# Altium PCB PCB_KEYBOARD.PcbDoc
Units mm, origin at the board's own origin, x right, y up, seen from the top; angles counter-clockwise.
Board outline 150.15 x 100.19 mm, 2 copper layers (Top Layer, Bottom Layer); 37 components, 31 nets, 203 pads, 20 vias.
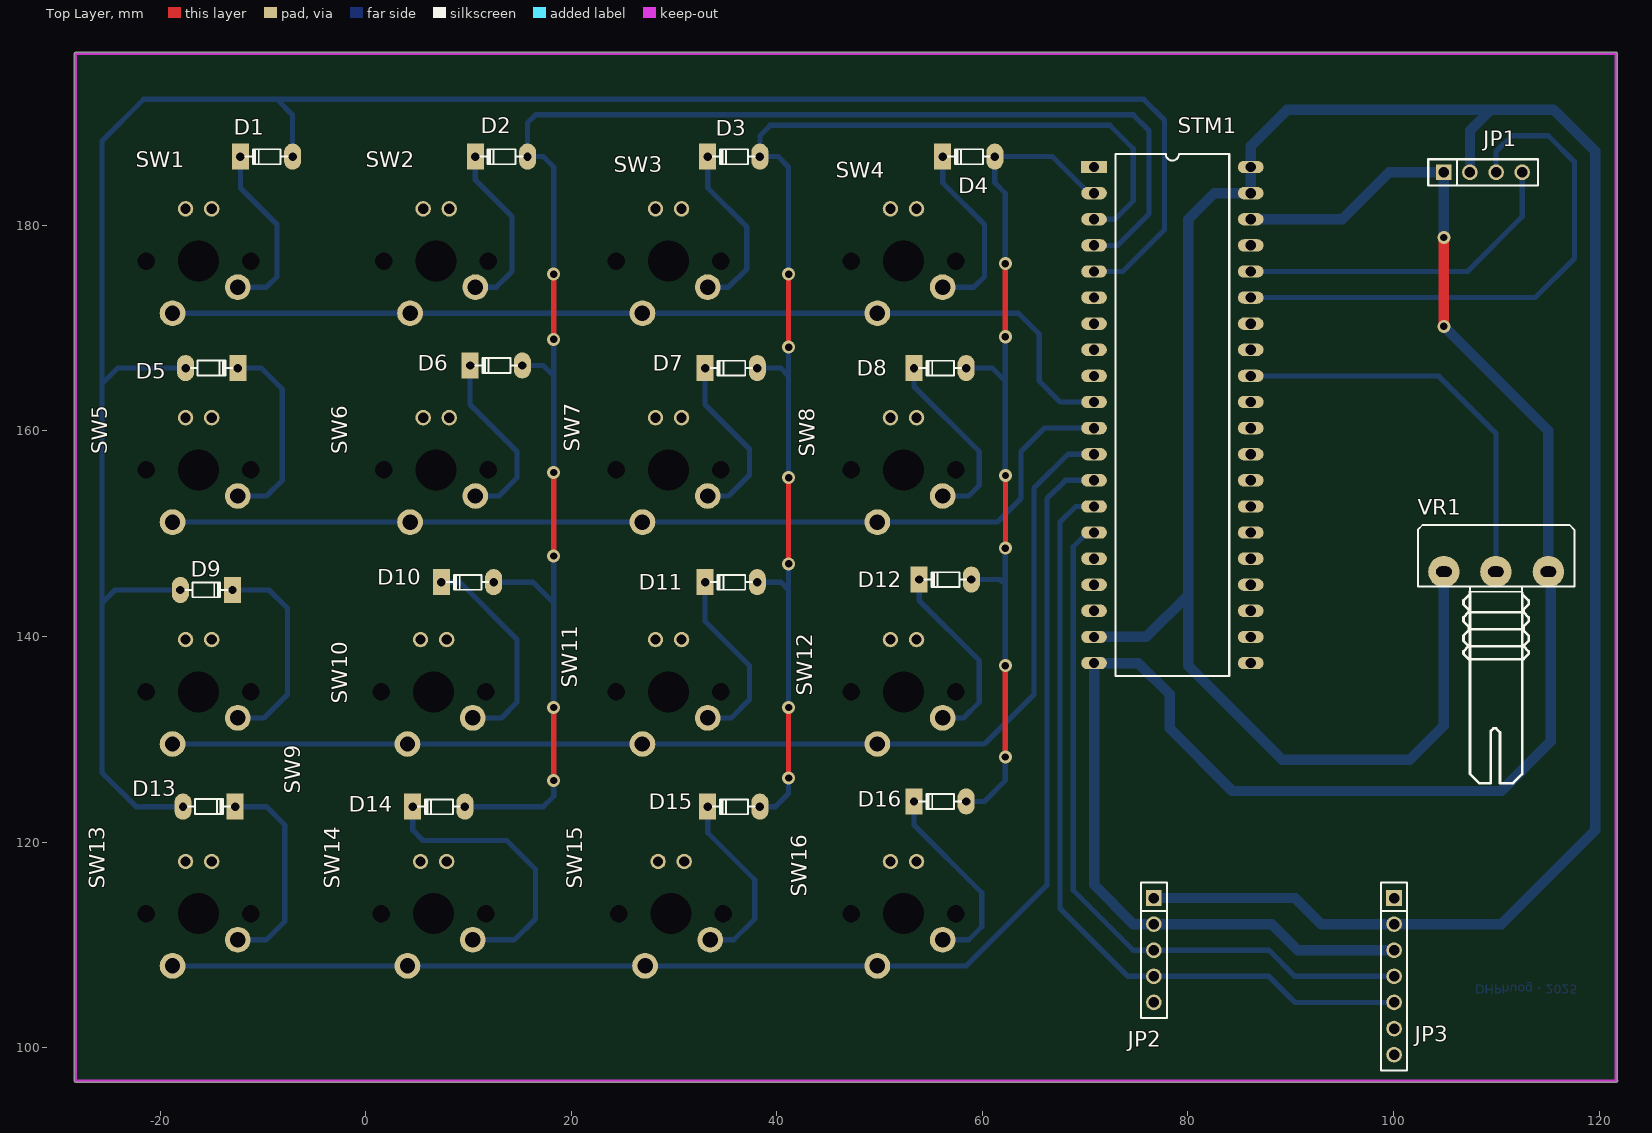
[diagram p0: Top Layer view]
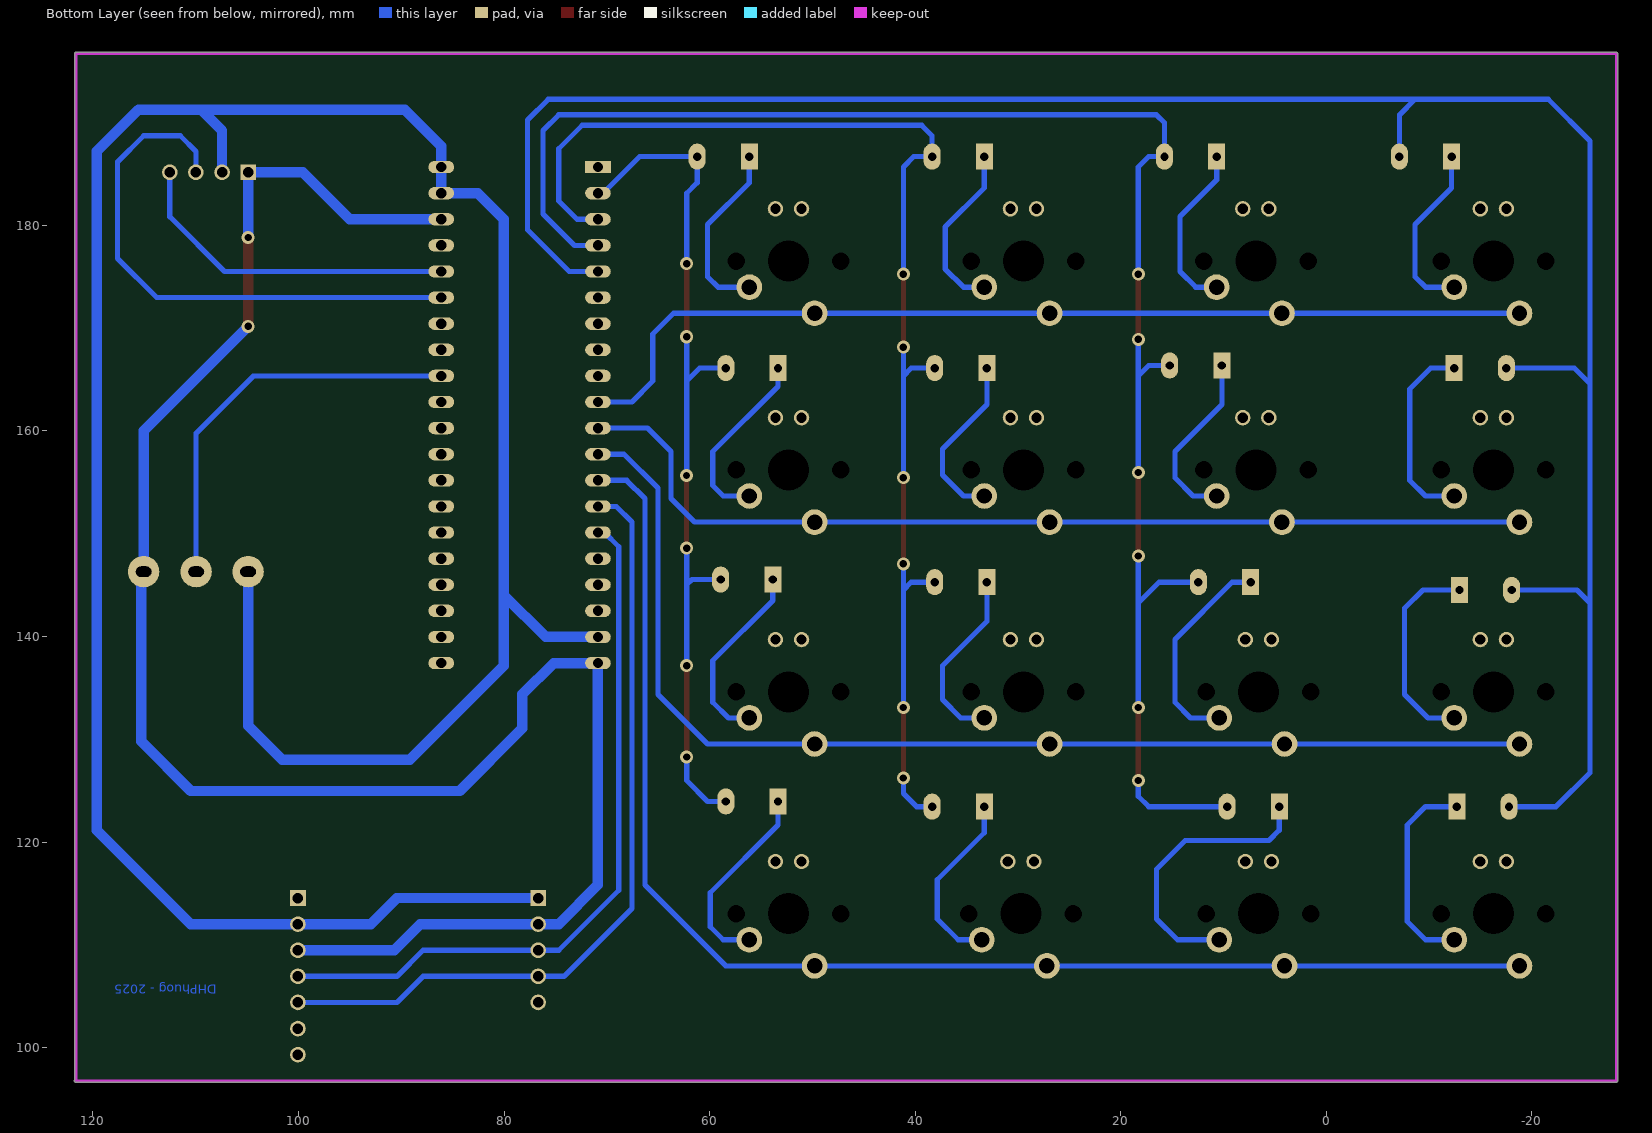
[diagram p1: Bottom Layer view, seen from below]
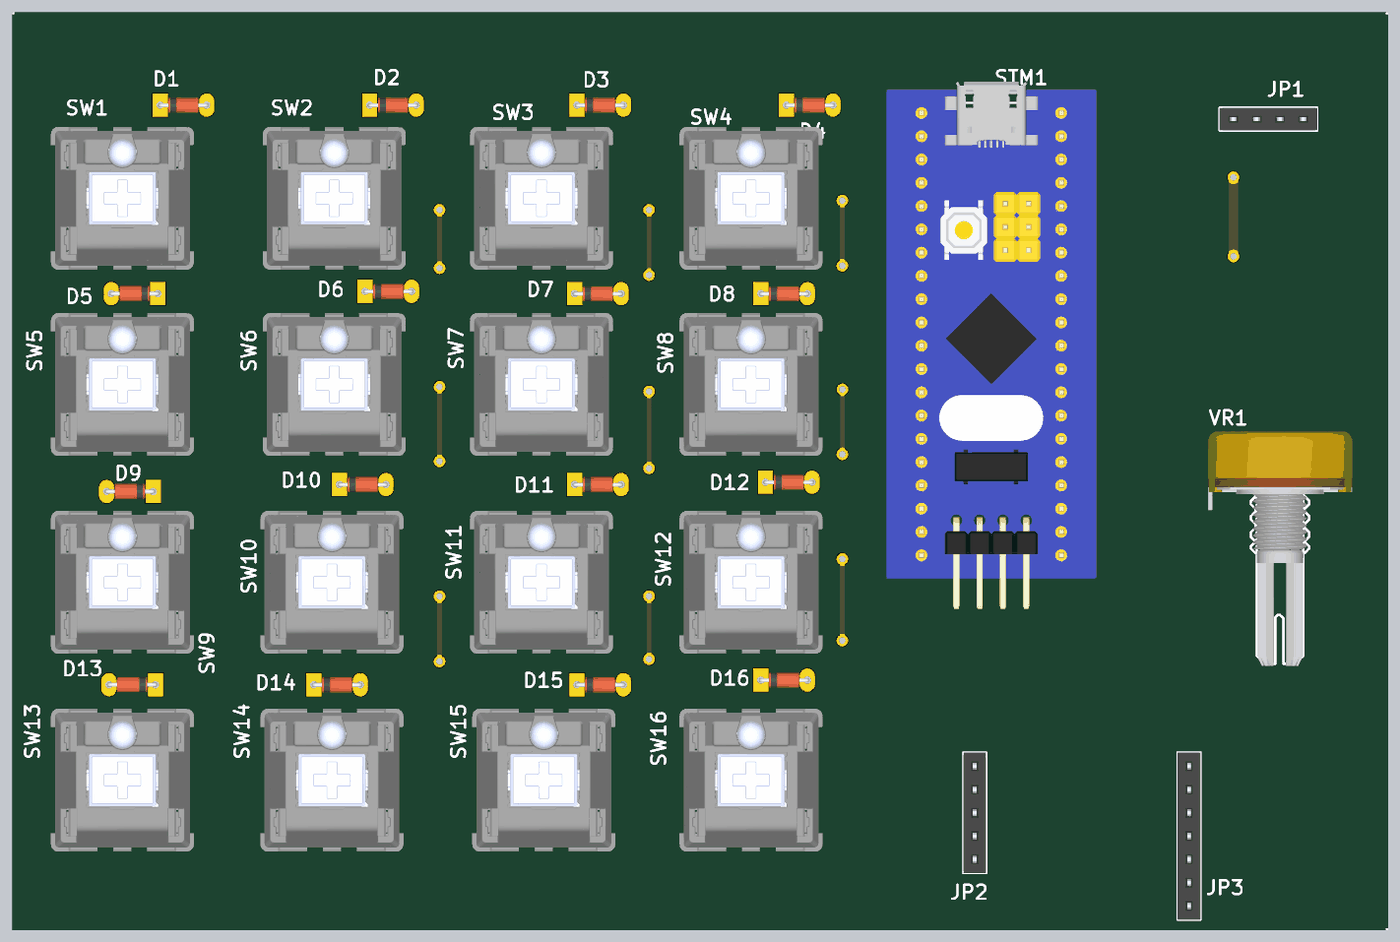
[diagram p2: 3D render of the assembled board from above, using the file's embedded part models]

## Layer stack, top to bottom
Top Solder: solder mask 0.0102, Solder Resist, Dk 3.5
Top Layer: signal copper 0.0356
Dielectric 1: dielectric 0.32, FR-4, Dk 4.8
Bottom Layer: signal copper 0.0356
Bottom Solder: solder mask 0.0102, Solder Resist, Dk 3.5

## Board outline
-28.219,96.647 cw(c-28.219,96.774) -28.346,96.774 -28.346,196.706 cw(c-28.219,196.706) -28.219,196.833 121.641,196.833 cw(c121.641,196.706) 121.768,196.706 121.768,187.706 121.768,96.866 cw(c121.68,96.774) 121.807,96.774 cw(c121.68,96.774) 121.68,96.647

## Design rules (kind name [scope] priority, off if disabled: settings)
Clearance [All] p1: gap=0.254 ignorepadtopadclearanceinfootprint=FALSE except(0: Arc-Hole Track-Hole SMDPad-Hole THPad-Hole Via-Hole Fill-Hole Poly-Hole Region-Hole Text-Hole)
PolygonConnect [All] p1: connectstyle=Relief reliefconductorwidth=0.254 reliefentries=4 polygonreliefangle="45 Angle" airgapwidth=0.508
RoutingVias [All] p1: holewidth=0.381 width=0.762 viastyle="Through Hole" minholewidth=0.254 minwidth=0.508 maxholewidth=0.711 maxwidth=1.27
SolderMaskExpansion [All] p1: expansion=0.102 istentingtop=FALSE
Width [All] p1: maxlimit=1.016 minlimit=0.254 preferedwidth=0.508
30 further rules are at their usual default settings.

## Classes and differential pairs
component class schematic: D2 D3 D5 D6 D7 D10 D11 D12 D13 D14 D16 JP1 JP2 JP3 STM1 SW1 SW2 SW3 SW4 SW5 SW6 SW7 SW8 SW9 SW11 SW12 SW13 SW14 SW15 SW16 VR1

## Components (designator, comment, footprint, x,y, rotation, side; value= is the part's Value field where it differs from the comment)
D1 "100v" "DIODE 0.5A" -9.652,186.69 r0 top
D2 "100v" "DIODE 0.5A" 13.208,186.69 r0 top
D3 "100v" "DIODE 0.5A" 35.814,186.69 r0 top
D4 "100v" "DIODE 0.5A" 58.674,186.69 r0 top
D5 "100v" "DIODE 0.5A" -14.986,166.116 r180 top
D6 "100v" "DIODE 0.5A" 12.7,166.37 r0 top
D7 "100v" "DIODE 0.5A" 35.56,166.116 r0 top
D8 "100v" "DIODE 0.5A" 55.88,166.116 r0 top
D9 "100v" "DIODE 0.5A" -15.494,144.526 r180 top
D10 "100v" "DIODE 0.5A" 9.906,145.288 r0 top
D11 "100v" "DIODE 0.5A" 35.56,145.288 r0 top
D12 "100v" "DIODE 0.5A" 56.388,145.542 r0 top
D13 "100v" "DIODE 0.5A" -15.24,123.444 r180 top
D14 "100v" "DIODE 0.5A" 7.112,123.444 r0 top
D15 "100v" "DIODE 0.5A" 35.814,123.444 r0 top
D16 "100v" "DIODE 0.5A" 55.88,123.952 r0 top
JP1 "JP 1x4 2.54" "JP 1x4 CT" 104.902,185.166 r0 top
JP2 "JP 1x5 2.54" "JP 1x5 CT" 76.683,114.554 r270 top
JP3 "JP 1x7 2.54" "JP 1x7 CT" 100.051,114.554 r270 top
STM1 "KIT STM32F103C8T6" "STM32F103 KIT" 70.866,185.674 r0 top
SW1 "Cherry MX with an LED" MX_Cherry_LED -16.256,176.53 r180 top
SW2 "Cherry MX with an LED" MX_Cherry_LED 6.858,176.53 r180 top
SW3 "Cherry MX with an LED" MX_Cherry_LED 29.464,176.53 r180 top
SW4 "Cherry MX with an LED" MX_Cherry_LED 52.324,176.53 r180 top
SW5 "Cherry MX with an LED" MX_Cherry_LED -16.256,156.21 r180 top
SW6 "Cherry MX with an LED" MX_Cherry_LED 6.858,156.21 r180 top
SW7 "Cherry MX with an LED" MX_Cherry_LED 29.464,156.21 r180 top
SW8 "Cherry MX with an LED" MX_Cherry_LED 52.324,156.21 r180 top
SW9 "Cherry MX with an LED" MX_Cherry_LED -16.256,134.62 r180 top
SW10 "Cherry MX with an LED" MX_Cherry_LED 6.604,134.62 r180 top
SW11 "Cherry MX with an LED" MX_Cherry_LED 29.464,134.62 r180 top
SW12 "Cherry MX with an LED" MX_Cherry_LED 52.324,134.62 r180 top
SW13 "Cherry MX with an LED" MX_Cherry_LED -16.256,113.03 r180 top
SW14 "Cherry MX with an LED" MX_Cherry_LED 6.604,113.03 r180 top
SW15 "Cherry MX with an LED" MX_Cherry_LED 29.718,113.03 r180 top
SW16 "Cherry MX with an LED" MX_Cherry_LED 52.324,113.03 r180 top
VR1 "10K" "Bien Tro Volume Don" 104.902,146.304 r0 top

## Footprints (in the part's own frame and the unit in brackets; to place one, negate y for a bottom-side part, rotate by r counter-clockwise, add the part's x,y. Pads: shape width x height; smd on the part's side, far side on the other; paste and mask are expansions set on the pad)
"Bien Tro Volume Don" [mil] "Volume control single"
  round 120 hole 40 slot 60 at 0 deg: 1(0,0) 2(199,0) 3(400,0)
  silkscreen extent -99,-810 500,179, body extent -110,-818 510,188, height 839
"DIODE 0.5A" [mil] "Diode muoi, xung"
  oval 65x100 hole 32: 1(100,0)
  rect 65x100 hole 32: 2(-100,0)
  silkscreen extent -80,-30 80,28, body extent -108,-33 108,32, height 61
"JP 1x4 CT" [mm]
  rect 1.52x1.52 hole 1.02: 1(0,0)
  round 1.52 hole 1.02: 2(2.54,0) 3(5.08,0) 4(7.62,0)
  silkscreen extent -1.52,-1.27 9.14,1.27, body extent -1.52,-1.25 9.14,1.25, height 8.51
"JP 1x5 CT" [mm]
  rect 1.52x1.52 hole 1.02: 1(0,0)
  round 1.52 hole 1.02: 2(2.54,0) 3(5.08,0) 4(7.62,0) 5(10.16,0)
  silkscreen extent -1.52,-1.27 11.68,1.27, body extent -1.52,-1.25 11.68,1.25, height 8.51
"JP 1x7 CT" [mm] "7 row, straight, gold plating"
  rect 1.52x1.52 hole 1.02: 1(0,0)
  round 1.52 hole 1.02: 2(2.54,0) 3(5.08,0) 4(7.62,0) 5(10.16,0) 6(12.7,0) 7(15.24,0)
  silkscreen extent -1.52,-1.27 16.76,1.27, body extent -1.52,-1.25 16.76,1.25, height 8.51
MX_Cherry_LED [mm] "Cherry Key Pad with LED"
  round 2.5 hole 1.5: 1(2.54,5.08) 2(-3.81,2.54)
  round 1.5 hole 1: 3(-1.27,-5.08) 4(1.27,-5.08)
  round 0 hole 1.702: 6(-5.08,0) 6(5.08,0)
  round 0 hole 3.988: Hole(0,0)
  body extent -7.75,-7.8 7.85,7.8, height 14.9
"STM32F103 KIT" [mm]
  rect 2.5x1.2 hole 1: 1(0,0)
  oval 2.5x1.2 hole 1: 2(0,-2.54) 3(0,-5.08) 4(0,-7.62) 5(0,-10.16) 6(0,-12.7) 7(0,-15.24) 8(0,-17.78) 9(0,-20.32) 10(0,-22.86) 11(0,-25.4) 12(0,-27.94) 13(0,-30.48) 14(0,-33.02) 15(0,-35.56) 16(0,-38.1) 17(0,-40.64) 18(0,-43.18) 19(0,-45.72) 20(0,-48.26) 21(15.24,-48.26) 22(15.24,-45.72) 23(15.24,-43.18) 24(15.24,-40.64) 25(15.24,-38.1) 26(15.24,-35.56) 27(15.24,-33.02) 28(15.24,-30.48) 29(15.24,-27.94) 30(15.24,-25.4) 31(15.24,-22.86) 32(15.24,-20.32) 33(15.24,-17.78) 34(15.24,-15.24) 35(15.24,-12.7) 36(15.24,-10.16) 37(15.24,-7.62) 38(15.24,-5.08) 39(15.24,-2.54) 40(15.24,0)
  silkscreen extent 2.08,-49.53 13.16,1.27, body extent -3.81,-53.97 19.05,3.59, height 16.12

## Part data
D1 D2 D3 D4 D5 D6 D7 D8 D9 D10 D11 D12 D13 D14 D15 D16: library part "Diode 1N4148", "Cắm", Chung_Loai=Cắm, Don_Vi=Con, Ma_Hang=MH001065, Ten_Linh_Kien="Diode 1N4148 DO35 450mA 100V ( 1N4148 DIP)"
JP1: library part "JP 1x4 2.54 Cai Thang", "Cắm", Chung_Loai=Cắm, Don_Vi=Con, Ma_Hang=MH004006, Ten_Linh_Kien="Jump Đơn Cái 2.54MM 1x20P Thẳng"
JP2: library part "JP 1x5 2.54 Cai Thang", "Cắm", Chung_Loai=Cắm, Don_Vi=Con, Ma_Hang=MH004006, Ten_Linh_Kien="Jump Đơn Cái 2.54MM 1x20P Thẳng"
JP3: library part "JP 1x7 2.54 Cai Thang", "Cắm", Chung_Loai=Cắm, Don_Vi=Con, Ma_Hang=MH004006, Ten_Linh_Kien="Jump Đơn Cái 2.54MM 1x20P Thẳng"
STM1: library part "STM32f103 Bluepill", "KIT STM32F103C8T6 Bluepill"
SW1 SW2 SW3 SW4 SW5 SW6 SW7 SW8 SW9 SW10 SW11 SW12 SW13 SW14 SW15 SW16: library part MX_Cherry_LED
VR1: library part "Triet Ap Don 10k", "Cắm", Chung_Loai=Cắm, Don_Vi=Con, Ma_Hang=MH001417, Ten_Linh_Kien="Triết Áp Đơn B10K"

## Via types
v1: diameter 1.27, hole 0.711, Top Layer to Bottom Layer, 20 vias

## Nets (pads, with @x,y where several pads share a name; then routed paths per layer and width w, separated by ;. In a path a pad name is that pad's centre, name@x,y a point inside that pad or via, vN(x,y) a via of type N, cw(c..) or ccw(c..) an arc to the next point about the centre after c; other vN are vias at no path point)
+3.3: JP1.1 JP2.2 JP3.3 STM1.20 STM1.38 VR1.3 | length 187.3
  Top Layer w1.016: v1(104.902,170.18) v1(104.902,178.816)
  Bottom Layer w1.016: STM1.38 94.996,180.594 99.568,185.166 JP1.1 v1(104.902,178.816) ; JP3.3 90.678,109.474 88.138,112.014 JP2.2 74.676,112.014 70.866,115.824 STM1.20 75.184,137.414 78.232,134.366 78.232,131.064 84.328,124.968 110.49,124.968 115.316,129.794 115.316,146.05 VR1.3 115.062,160.02 v1(104.902,170.18)
COL1: D1.1 D5.1 D9.1 D13.1 STM1.5 | length 218.9
  Bottom Layer w0.508: D9.1 -24.384,144.526 -25.654,143.256 ; D13.1 -22.352,123.444 -25.654,126.746 -25.654,143.256 ; D5.1 -24.13,166.116 -25.654,164.592 ; D1.1 -7.112,190.754 -8.636,192.278 ; STM1.5 73.66,175.514 77.724,179.578 77.724,190.246 75.692,192.278 -8.636,192.278 ; -25.654,143.256 -25.654,164.592 ; -25.654,164.592 -25.654,188.214 -21.59,192.278 -8.636,192.278
COL2: D2.1 D6.1 D10.1 D14.1 STM1.4 | length 162.8
  Top Layer w0.508: v1(18.288,125.984) v1(18.288,133.096) ; v1(18.288,147.828) v1(18.288,155.956) ; v1(18.288,168.91) v1(18.288,175.26)
  Bottom Layer w0.508: D14.1 17.272,123.444 18.288,124.46 v1(18.288,125.984) ; D10.1 16.256,145.288 18.288,143.256 ; D6.1 17.272,166.37 18.288,165.354 ; v1(18.288,133.096) 18.288,143.256 ; v1(18.288,147.828) 18.288,143.256 ; v1(18.288,155.956) 18.288,165.354 ; v1(18.288,168.91) 18.288,165.354 ; v1(18.288,175.26) 18.288,185.674 17.272,186.69 D2.1 15.748,189.992 16.51,190.754 74.676,190.754 76.2,189.23 76.2,181.102 73.152,178.054 STM1.4
COL3: D3.1 D7.1 D11.1 D15.1 STM1.3 | length 123.6
  Top Layer w0.508: v1(41.148,126.238) v1(41.148,133.096) ; v1(41.148,147.066) v1(41.148,155.448) ; v1(41.148,168.148) v1(41.148,175.26)
  Bottom Layer w0.508: D11.1 40.386,145.288 41.148,144.526 ; D7.1 40.386,166.116 41.148,165.354 ; D15.1 39.878,123.444 41.148,124.714 v1(41.148,126.238) ; v1(41.148,133.096) 41.148,144.526 ; v1(41.148,147.066) 41.148,144.526 ; v1(41.148,155.448) 41.148,165.354 ; v1(41.148,168.148) 41.148,165.354 ; v1(41.148,175.26) 41.148,185.674 40.132,186.69 D3.1 38.354,188.722 39.37,189.738 72.39,189.738 74.676,187.452 74.676,182.372 72.898,180.594 STM1.3
COL4: D4.1 D8.1 D12.1 D16.1 STM1.2 | length 84.3
  Top Layer w0.508: v1(62.23,128.27) v1(62.23,137.16) ; v1(62.23,148.59) 62.243,148.603 v1(62.243,155.668) ; v1(62.23,169.164) v1(62.23,176.276)
  Bottom Layer w0.508: D16.1 60.198,123.952 62.23,125.984 v1(62.23,128.27) ; D8.1 60.96,166.116 62.23,164.846 ; D12.1 61.722,145.542 62.23,145.034 ; v1(62.23,137.16) 62.23,145.034 ; v1(62.23,148.59) 62.23,145.034 ; v1(62.23,169.164) 62.23,164.846 ; v1(62.23,176.276) 62.23,183.134 61.214,184.15 D4.1 66.802,186.69 STM1.2@70.358,183.134 ; v1(62.243,155.668) 62.23,155.681 62.23,164.846
DS1307_SCL: JP2.4 JP3.5 STM1.14 | length 77.8
  Bottom Layer w0.508: STM1.14 69.088,152.654 67.564,151.13 67.564,113.538 74.168,106.934 JP2.4 87.884,106.934 90.424,104.394 JP3.5
DS1307_SDA: JP2.3 JP3.4 STM1.15 | length 70.7
  Bottom Layer w0.508: STM1.15 70.216,150.114 68.834,148.732 68.834,115.316 74.676,109.474 JP2.3 87.884,109.474 90.424,106.934 JP3.4
GND: JP1.2 JP2.1 JP3.2 STM1.19 STM1.39 STM1.40 VR1.1 | length 269.1
  Bottom Layer w1.016: STM1.19@70.216,139.954 STM1.19 75.946,139.954 80.01,144.018 ; JP2.1 90.424,114.554 92.964,112.014 JP3.2 110.49,112.014 119.634,121.158 119.634,187.198 115.57,191.262 109.474,191.262 ; VR1.1 104.902,131.318 101.6,128.016 89.154,128.016 80.01,137.16 80.01,144.018 ; JP1.2 107.442,189.23 109.474,191.262 ; 80.01,144.018 80.01,180.594 82.55,183.134 STM1.39 STM1.40 86.106,187.706 89.662,191.262 109.474,191.262
NetD1_2: D1.2 SW1.2 | length 17.4
  Bottom Layer w0.508: SW1.2 -9.652,173.99 -8.636,175.006 -8.636,180.086 -12.192,183.642 D1.2
NetD2_2: D2.2 SW2.2 | length 16.8
  Bottom Layer w0.508: SW2.2 12.7,173.99 14.224,175.514 14.224,180.848 10.668,184.404 D2.2
NetD3_2: D3.2 SW3.2 | length 17
  Bottom Layer w0.508: SW3.2 35.306,173.99 37.084,175.768 37.084,179.832 33.274,183.642 D3.2
NetD4_2: D4.2 SW4.2 | length 17.9
  Bottom Layer w0.508: SW4.2 59.182,173.99 60.198,175.006 60.198,180.086 56.134,184.15 D4.2
NetD5_2: D5.2 SW5.2 | length 19
  Bottom Layer w0.508: SW5.2 -9.652,153.67 -8.128,155.194 -8.128,164.084 -10.16,166.116 D5.2
NetD6_2: D6.2 SW6.2 | length 17.6
  Bottom Layer w0.508: D6.2 10.16,162.56 14.732,157.988 14.732,155.448 12.954,153.67 SW6.2
NetD7_2: D7.2 SW7.2 | length 17.1
  Bottom Layer w0.508: D7.2 33.02,162.56 37.338,158.242 37.338,155.702 35.306,153.67 SW7.2
NetD8_2: D8.2 SW8.2 | length 18
  Bottom Layer w0.508: D8.2 53.34,164.338 59.69,157.988 59.69,154.686 58.674,153.67 SW8.2
NetD9_2: D9.2 SW9.2 | length 20.2
  Bottom Layer w0.508: D9.2 -9.398,144.526 -7.62,142.748 -7.62,134.366 -9.906,132.08 SW9.2
NetD10_2: D10.2 SW10.2 | length 20.7
  Bottom Layer w0.508: D10.2 9.144,145.288 14.732,139.7 14.732,133.604 13.208,132.08 SW10.2
NetD11_2: D11.2 SW11.2 | length 18
  Bottom Layer w0.508: D11.2 33.02,141.478 37.338,137.16 37.338,133.858 35.56,132.08 SW11.2
NetD12_2: D12.2 SW12.2 | length 18.5
  Bottom Layer w0.508: D12.2 53.848,143.51 59.69,137.668 59.69,133.604 58.166,132.08 SW12.2
NetD13_2: D13.2 SW13.2 | length 20.3
  Bottom Layer w0.508: D13.2 -9.652,123.444 -7.874,121.666 -7.874,112.268 -9.652,110.49 SW13.2
NetD14_2: D14.2 SW14.2 | length 27.6
  Bottom Layer w0.508: D14.2 4.572,121.158 5.588,120.142 13.716,120.142 16.51,117.348 16.51,112.522 14.478,110.49 SW14.2
NetD15_2: D15.2 SW15.2 | length 18
  Bottom Layer w0.508: D15.2 33.274,120.904 37.846,116.332 37.846,112.522 35.814,110.49 SW15.2
NetD16_2: D16.2 SW16.2 | length 19.3
  Bottom Layer w0.508: D16.2 53.34,121.666 59.944,115.062 59.944,111.76 58.674,110.49 SW16.2
OLED_SCL: JP1.3 STM1.35 | length 54.1
  Bottom Layer w0.508: STM1.35 113.792,172.974 117.602,176.784 117.602,186.182 115.062,188.722 111.506,188.722 109.982,187.198 JP1.3 JP1.3@109.788,185.36
OLED_SDA: JP1.4 STM1.36 | length 32.9
  Bottom Layer w0.508: STM1.36 107.188,175.514 112.522,180.848 JP1.4
ROW1: STM1.10 SW1.1 SW2.1 SW3.1 SW4.1 | length 95.9
  Bottom Layer w0.508: SW1.1 SW2.1 SW3.1 SW4.1 63.5,171.45 65.532,169.418 65.532,164.846 67.564,162.814 STM1.10
ROW2: STM1.11 SW5.1 SW6.1 SW7.1 SW8.1 | length 96.4
  Bottom Layer w0.508: SW5.1 SW6.1 SW7.1 SW8.1 61.468,151.13 63.754,153.416 63.754,157.988 66.04,160.274 STM1.11 STM1.11@71.12,160.274
ROW3: STM1.12 SW9.1 SW10.1 SW11.1 SW12.1 | length 113.1
  Bottom Layer w0.508: SW9.1 SW10.1 SW11.1 SW12.1 60.198,129.54 65.024,134.366 65.024,154.432 68.326,157.734 STM1.12
ROW4: STM1.13 SW13.1 SW14.1 SW15.1 SW16.1 | length 131.3
  Bottom Layer w0.508: SW13.1 SW14.1 SW15.1 SW16.1 58.42,107.95 66.294,115.824 66.294,153.416 68.072,155.194 STM1.13
VOL_CONTROL: STM1.32 VR1.2 | length 39.7
  Bottom Layer w0.508: STM1.32 104.394,165.354 109.982,159.766 109.982,146.329 VR1.2
pads on no net: JP2.5 JP3.1 JP3.6 JP3.7 STM1.1 STM1.6 STM1.7 STM1.8 STM1.9 STM1.16 STM1.17 STM1.18 STM1.21 STM1.22 STM1.23 STM1.24 STM1.25 STM1.26 STM1.27 STM1.28 STM1.29 STM1.30 STM1.31 STM1.33 STM1.34 STM1.37 SW1.3 SW1.4 SW1.6 SW1.Hole SW2.3 SW2.4 SW2.6 SW2.Hole SW3.3 SW3.4 SW3.6 SW3.Hole SW4.3 SW4.4 SW4.6 SW4.Hole SW5.3 SW5.4 SW5.6 SW5.Hole SW6.3 SW6.4 SW6.6 SW6.Hole SW7.3 SW7.4 SW7.6 SW7.Hole SW8.3 SW8.4 SW8.6 SW8.Hole SW9.3 SW9.4 SW9.6 SW9.Hole SW10.3 SW10.4 SW10.6 SW10.Hole SW11.3 SW11.4 SW11.6 SW11.Hole SW12.3 SW12.4 SW12.6 SW12.Hole SW13.3 SW13.4 SW13.6 SW13.Hole SW14.3 SW14.4 SW14.6 SW14.Hole SW15.3 SW15.4 SW15.6 SW15.Hole SW16.3 SW16.4 SW16.6 SW16.Hole

## Keep-outs
Keep-Out Layer:
  lines w0.254: -28.219,96.774 -28.219,196.706 61.722,196.706 121.641,196.706 121.641,187.706 ; -28.194,96.774 121.641,96.774 121.641,193.802

## Other copper
Bottom Layer:
  text "DHPhuog - 2025" at 107.95,106.394 h1.52 r180

## Dimensions
121.641,196.706 to 121.641,96.774 on Top Overlay
-28.219,196.706 to 121.641,196.706 on Top Overlay